# Altium PCB PCB1 (2).PcbDoc
Units mm, origin at the board's own origin, x right, y up, seen from the top; angles counter-clockwise.
Board outline 152.4 x 101.6 mm, 2 copper layers (Top Layer, Bottom Layer); 19 components, 27 nets, 95 pads, 1 vias.
Unrouted connection lines stored in the file: 3.
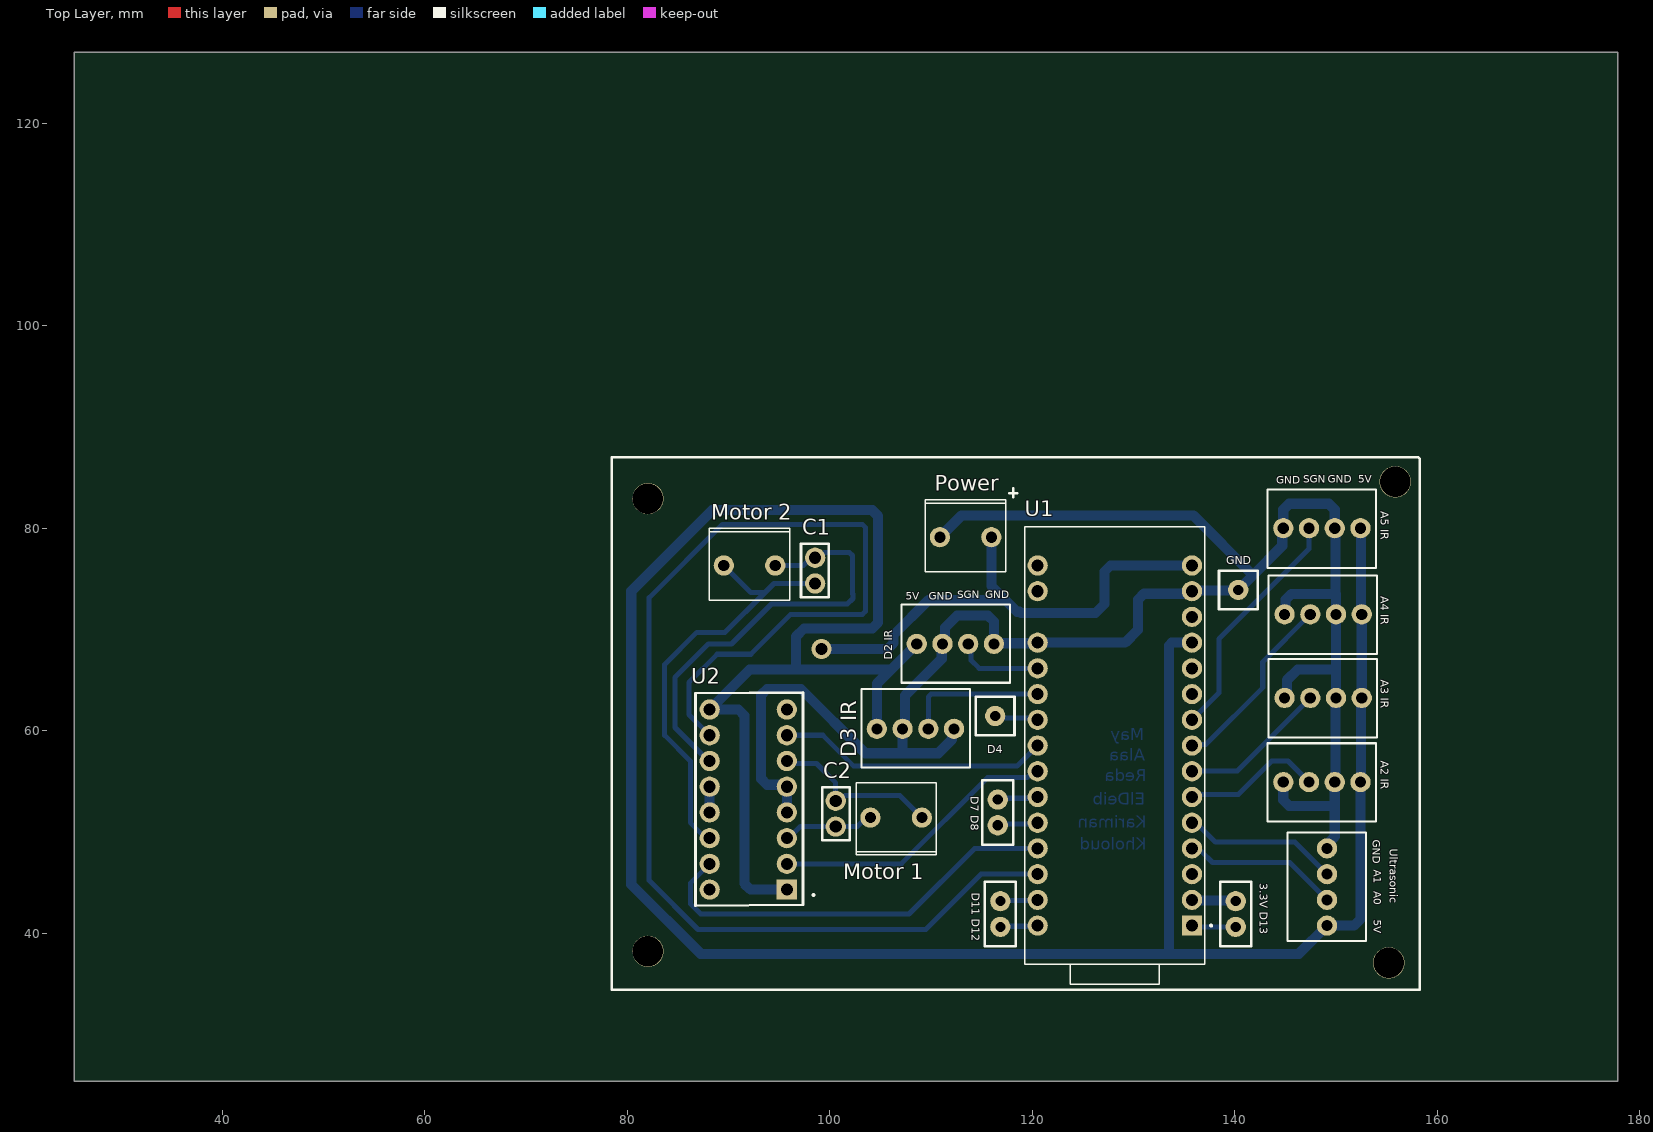
[diagram p0: Top Layer view]
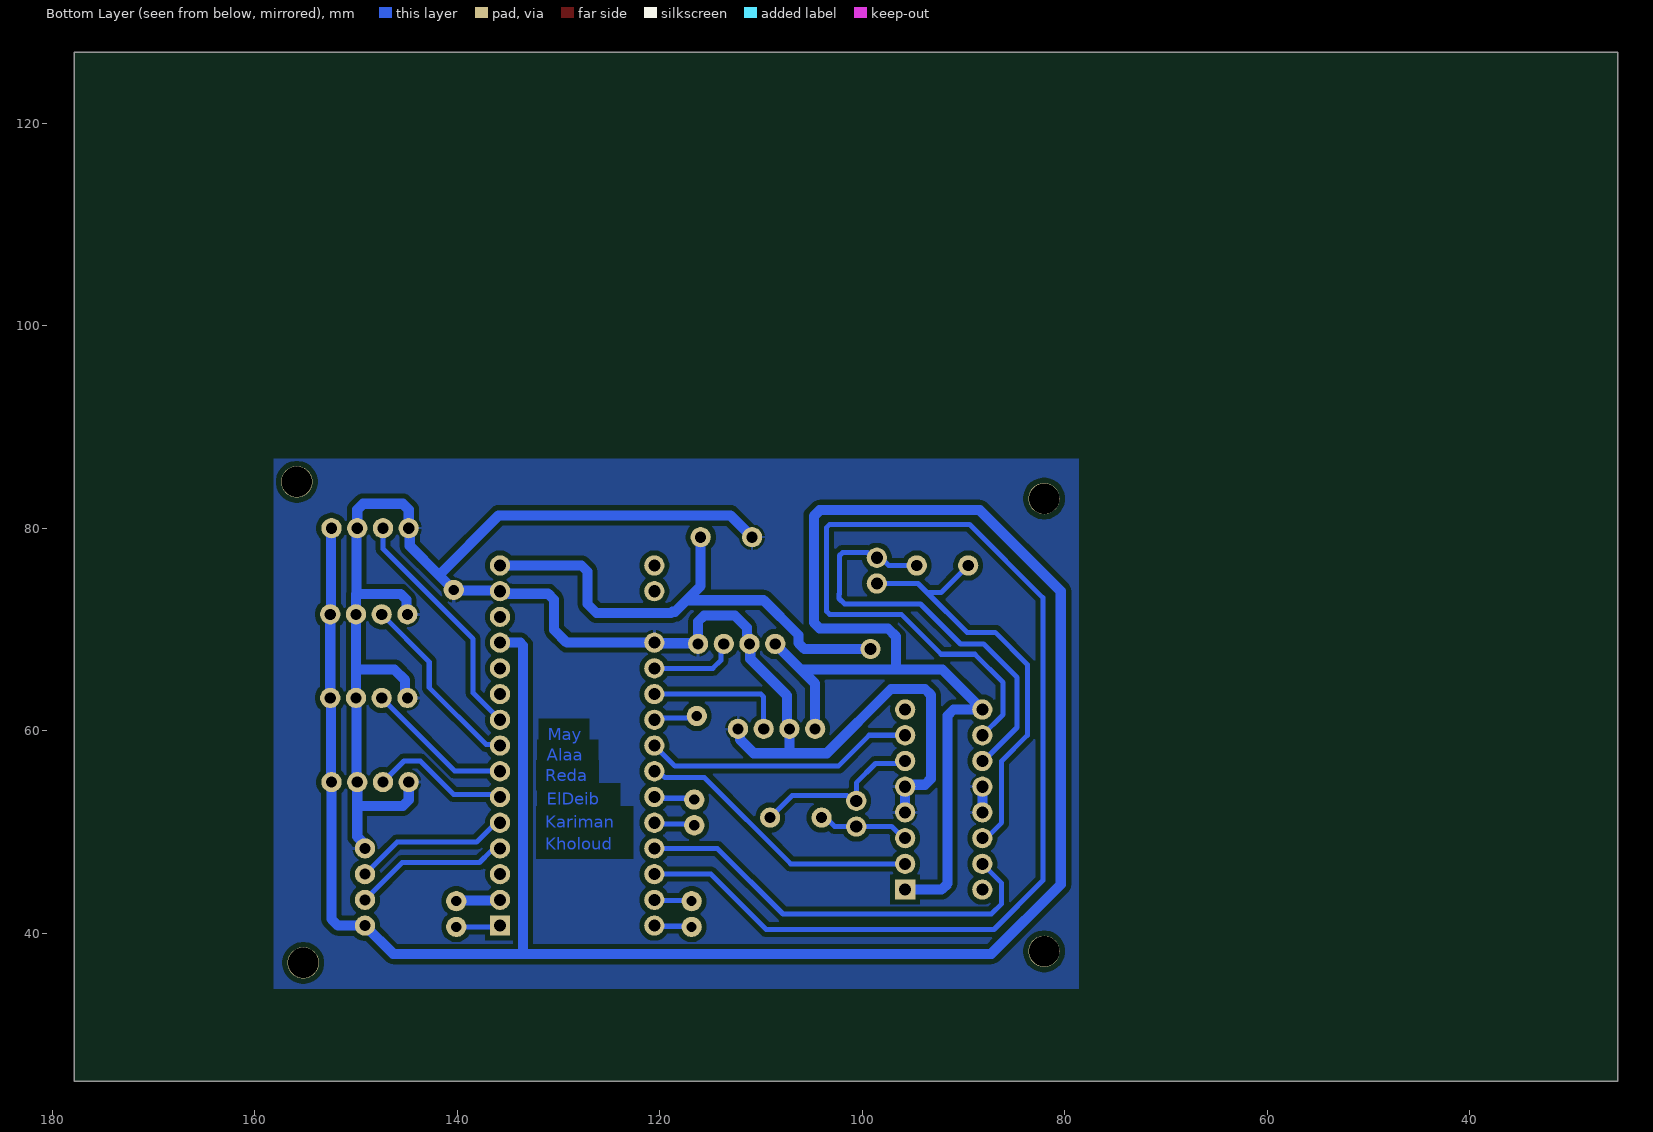
[diagram p1: Bottom Layer view, seen from below]
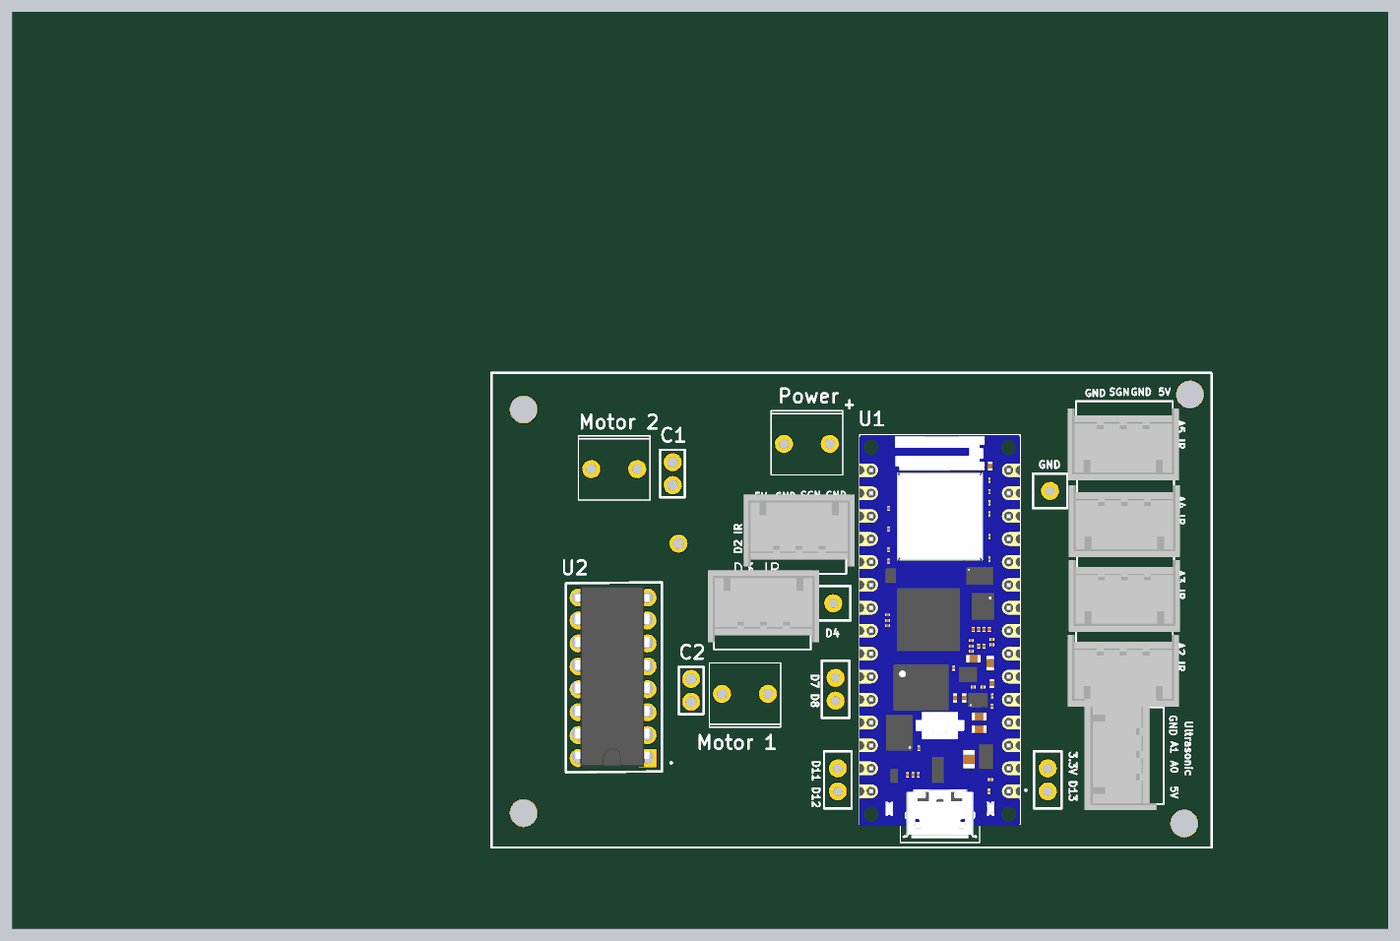
[diagram p2: 3D render of the assembled board from above, using the file's embedded part models]

## Layer stack, top to bottom
Top Solder: solder mask 0.0102, Solder Resist, Dk 3.5
Top Layer: signal copper 0.0356
Dielectric 1: dielectric 0.32, FR-4, Dk 4.8
Bottom Layer: signal copper 0.0356
Bottom Solder: solder mask 0.0102, Solder Resist, Dk 3.5

## Board outline
25.4,25.4 177.8,25.4 177.8,127 25.4,127

## Design rules (kind name [scope] priority, off if disabled: settings)
Clearance [All] p1: gap=0.5 ignorepadtopadclearanceinfootprint=TRUE
PolygonConnect [All] p1: connectstyle=Relief reliefconductorwidth=0.254 reliefentries=4 polygonreliefangle="90 Angle" airgapwidth=0.254
RoutingVias [All] p1: holewidth=0.711 width=1.27 viastyle="Through Hole" minholewidth=0.711 minwidth=1.27 maxholewidth=0.711 maxwidth=1.27
SolderMaskExpansion [All] p1: expansion=0.102 istentingtop=FALSE
Width [All] p1: maxlimit=1 minlimit=0.5 preferedwidth=0.7
30 further rules are at their usual default settings.

## Classes and differential pairs
component class Sheet1: "3.3V D13" "A2 IR" "A3 IR" "A4 IR" "A5 IR" C1 C2 "D2 IR" "D3 IR" "D7 D8" "D11 D12" GND "Motor 1" "Motor 2" Power U1 U2 Ultrasonic

## Components (designator, comment, footprint, x,y, rotation, side; value= is the part's Value field where it differs from the comment)
"3.3V D13" "2 pin female header" "2 pin female header" 140.081,49.098 r90 top (schematic designator nrf)
"A2 IR" "4pin jst" "4PIN JST" 149.225,49.911 r180 top
"A3 IR" "4pin jst" "4PIN JST" 149.352,58.217 r180 top
"A4 IR" "4pin jst" "4PIN JST" 149.352,66.472 r180 top
"A5 IR" "4pin jst" "4PIN JST" 149.225,74.981 r180 top
C1 "Capacitor" CAPACITOR 98.552,77.089 r270 top
C2 "Capacitor" CAPACITOR 100.584,50.546 r90 top
"D2 IR" "4pin jst" "4PIN JST" 111.76,73.609 r0 top
"D3 IR" "4pin jst" "4PIN JST" 107.823,65.227 r0 top
D4 "1 pin female header" "1 pin female header" 116.307,58.877 r90 top (schematic designator "digitAL PIN")
"D7 D8" "2 pin female header" "2 pin female header" 116.586,44.755 r270 top (schematic designator nrf3)
"D11 D12" "2 pin female header" "2 pin female header" 116.84,34.722 r270 top (schematic designator "nrf 2")
GND "1 pin female header" "1 pin female header" 140.31,71.323 r90 top (schematic designator "gnd pin")
"Motor 1" "2pin terminal block" "2PIN TERMINAL BLOCK" 107.417,57.887 r0 top
"Motor 2" "2pin terminal block" "2PIN TERMINAL BLOCK" 91.211,69.875 r180 top
Power "2pin terminal block" "2PIN TERMINAL BLOCK" 112.547,72.669 r180 top
U1 "Arduino Nano" "Arduino Nano" 128.143,58.547 r90 top
U2 "L293D" L293D 91.358,53.213 r180 top
Ultrasonic "4pin jst" "4PIN JST" 144.069,43.942 r90 top

## Footprints (in the part's own frame and the unit in brackets; to place one, negate y for a bottom-side part, rotate by r counter-clockwise, add the part's x,y. Pads: shape width x height; smd on the part's side, far side on the other; paste and mask are expansions set on the pad)
"1 pin female header" [mm]
  round 2 hole 1: 1(2.591,-0.025)
  silkscreen extent 0.69,-1.93 4.5,1.88
"2 pin female header" [mm]
  round 2 hole 1: 1(-8.458,0) 2(-5.918,0)
  silkscreen extent -10.36,-1.52 -4.01,1.52
"2PIN TERMINAL BLOCK" [mm]
  round 2 hole 1.1: 1(-3.404,-6.452) 2(1.676,-6.452)
  silkscreen extent -4.83,-10.13 3.1,-3.02, body extent -6.29,-11.07 4.31,-2.07, height 12.63
"4PIN JST" [mm]
  round 2 hole 1.1: 1(-3.175,-5.029) 2(-0.635,-5.029) 3(1.905,-5.029) 4(4.445,-5.029)
  silkscreen extent -4.7,-8.86 6.02,-1.12, body extent -5.36,-8.05 6.93,-0.1, height 10.43
"Arduino Nano" [mm]
  rect 2x2 hole 1.2: 1(-17.78,-7.62)
  round 2 hole 1.2: 2(-15.24,-7.62) 3(-12.7,-7.62) 4(-10.16,-7.62) 5(-7.62,-7.62) 6(-5.08,-7.62) 7(-2.54,-7.62) 8(0,-7.62) 9(2.54,-7.62) 10(5.08,-7.62) 11(7.62,-7.62) 12(10.16,-7.62) 13(12.7,-7.62) 14(15.24,-7.62) 15(17.78,-7.62) 16(17.78,7.62) 17(15.24,7.62) 19(10.16,7.62) 20(7.62,7.62) 21(5.08,7.62) 22(2.54,7.62) 23(0,7.62) 24(-2.54,7.62) 25(-5.08,7.62) 26(-7.62,7.62) 27(-10.16,7.62) 28(-12.7,7.62) 29(-15.24,7.62) 30(-17.78,7.62)
  silkscreen extent -23.59,-9.6 21.59,8.88, body extent -23.11,-8.89 21.47,8.88, height 8.51
CAPACITOR [mm]
  round 2 hole 1.2: 1(0,0) 2(2.54,0)
  silkscreen extent -1.37,-1.4 3.89,1.35
L293D [mm]
  rect 2x2 hole 1.2: 1(-4.4,8.89)
  round 2 hole 1.2: 2(-4.4,6.35) 3(-4.4,3.81) 4(-4.4,1.27) 5(-4.4,-1.27) 6(-4.4,-3.81) 7(-4.4,-6.35) 8(-4.4,-8.89) 9(3.22,-8.89) 10(3.22,-6.35) 11(3.22,-3.81) 12(3.22,-1.27) 13(3.22,1.27) 14(3.22,3.81) 15(3.22,6.35) 16(3.22,8.89)
  silkscreen extent -7.14,-10.57 4.62,10.46, body extent -5.12,-10.16 4.12,9.84, height 1.9

## Part data
"A2 IR" "A3 IR" "A4 IR" "A5 IR" "D2 IR" "D3 IR" Ultrasonic: "Connector Header Through Hole 4 position 0.079 (2.00mm)", Package=None, Availability="In Stock", Check_prices=https://www.snapeda.com/parts/B4B-PH-K/JST/view-part/?ref=eda, MF=JST, MP=B4B-PH-K, Price=None, Purchase-URL=https://pricing.snapeda.com/search/part/B4B-PH-K/?ref=eda, SnapEDA_Link=https://www.snapeda.com/parts/B4B-PH-K/JST/view-part/?ref=snap
"Motor 1" "Motor 2" Power: "Connector Terminal Blocks Receptacle 2 Position 5.08mm Solder Straight Thru-Hole 13.5A/Contact", Package=None, Availability="In Stock", Check_prices=https://www.snapeda.com/parts/282837-2/TE+Connectivity+AMP+Connectors/view-part/?ref=eda, MF="TE Connectivity", MP=282837-2, Price=None, Purchase-URL=https://pricing.snapeda.com/search/part/282837-2/?ref=eda, SnapEDA_Link=https://www.snapeda.com/parts/282837-2/TE+Connectivity+AMP+Connectors/view-part/?ref=snap
U1: "NINA-W102, RP2040 Arduino Nano RP2040 Connect with Headers series ARMÂ® CortexÂ®-M0+ MCU 32-Bit Embedded Evaluation Board", Package=None, Check_prices=https://www.snapeda.com/parts/ABX00053/Arduino/view-part/?ref=eda, Digi-Key_Part_Number=1050-ABX00053-ND, MF=Arduino, MP=ABX00053, Purchase-URL=https://pricing.snapeda.com/search/part/ABX00053/?ref=eda, SnapEDA_Link=https://www.snapeda.com/parts/ABX00053/Arduino/view-part/?ref=snap
U2: "Bipolar Motor Driver - Parallel 16-PowerDIP", Package="DIP-16 STMicroelectronics", Availability="In Stock", Check_prices=https://www.snapeda.com/parts/L293D/STMicroelectronics/view-part/?ref=eda, MF=STMicroelectronics, MP=L293D, Price=None, Purchase-URL=https://pricing.snapeda.com/search/part/L293D/?ref=eda, SnapEDA_Link=https://www.snapeda.com/parts/L293D/STMicroelectronics/view-part/?ref=snap

## Free pads (board coordinates)
  round 3.1 hole 3: 2(82.042,38.227) 2(82.042,82.931) 2(155.194,37.084) 2(155.829,84.582)

## Via types
v1: diameter 2, hole 1.2, Top Layer to Bottom Layer, 1 vias

## Nets (pads, with @x,y where several pads share a name; then routed paths per layer and width w, separated by ;. In a path a pad name is that pad's centre, name@x,y a point inside that pad or via, vN(x,y) a via of type N, cw(c..) or ccw(c..) an arc to the next point about the centre after c; other vN are vias at no path point)
+3.3V: "3.3V D13.2" U1.2 | length 4.4
  Bottom Layer w0.5: U1.2 U1.2@135.826,43.243 ; 140.017,43.243 140.081,43.18
  Bottom Layer w1: U1.2@135.826,43.243 140.017,43.243
+5V: "A2 IR.1" "A3 IR.1" "A4 IR.1" "A5 IR.1" "D2 IR.1" "D3 IR.1" U1.12 U2.1 U2.9 Ultrasonic.1 | length 281.6
  Bottom Layer w0.5: 133.477,38.266 133.77,37.973 ; 133.477,68.414 133.77,68.707 ; 152.4,54.94 152.463,55.004 ; 152.4,80.01 152.463,79.947 ; 152.463,63.182 152.527,63.246 ; 152.463,71.564 152.527,71.501
  Bottom Layer w1: U2.1 92.153,44.323 91.567,44.909 91.567,61.517 90.981,62.103 U2.9 92.075,66.04 96.647,66.04 ; 104.648,60.198 104.648,64.643 106.045,66.04 ; 108.585,68.58 106.045,66.04 ; 133.477,38.266 133.477,68.414 ; 133.77,68.707 U1.12 ; 152.4,54.94 152.4,41.402 151.765,40.767 Ultrasonic.1 146.304,37.973 133.77,37.973 87.249,37.973 80.391,44.831 80.391,73.787 88.392,81.788 104.189,81.788 104.775,81.202 104.775,70.689 104.189,70.104 97.46,70.104 96.647,69.291 96.647,66.04 ; 152.463,55.004 152.463,63.182 ; 152.463,71.564 152.463,79.947 ; 152.527,63.246 152.527,71.501 ; 96.647,66.04 106.045,66.04
A0: U1.4 Ultrasonic.2 | length 15.4
  Bottom Layer w0.5: U1.4 136.05,48.1 136.685,48.1 137.795,46.99 145.415,46.99 Ultrasonic.2
A1: U1.5 Ultrasonic.3 | length 15.4
  Bottom Layer w0.5: U1.5 136.169,50.927 138.074,49.022 145.923,49.022 Ultrasonic.3
A2: "A2 IR.3" U1.6 | length 13.9
  Bottom Layer w0.5: U1.6 136.017,53.721 140.335,53.721 143.637,57.023 145.237,57.023 147.32,54.94
A3: "A3 IR.3" U1.7 | length 14.7
  Bottom Layer w0.5: U1.7 135.802,56.046 140.247,56.046 147.447,63.246
A4: "A4 IR.3" U1.8 | length 18.5
  Bottom Layer w0.5: U1.8 135.865,58.649 137.135,58.649 142.748,64.262 142.748,66.802 147.447,71.501
A5: "A5 IR.3" U1.9 | length 23.7
  Bottom Layer w0.5: U1.9 138.43,63.754 138.43,69.088 147.32,77.978 147.32,80.01
A6: U1.10
D2: "D2 IR.3" U1.20 | length 8.6
  Bottom Layer w0.5: 113.665,68.58 113.952,68.293 113.952,66.968 114.753,66.167 U1.20
D3: "D3 IR.3" U1.21 | length 14.1
  Bottom Layer w0.5: 109.728,60.198 109.728,63.334 110.021,63.627 U1.21
D4: D4.1 U1.22 | length 4.3
  Bottom Layer w0.5: D4.1 116.522,61.277 120.332,61.277 U1.22
D7: "D7 D8.1" U1.25 | length 4
  Bottom Layer w0.5: 116.586,53.213 116.713,53.34 120.396,53.34 U1.25
D8: "D7 D8.2" U1.26 | length 4
  Bottom Layer w0.5: 116.586,50.673 116.713,50.8 120.396,50.8 U1.26
D11: "D11 D12.1" U1.29 | length 3.7
  Bottom Layer w0.5: 116.84,43.18 116.903,43.243 120.459,43.243 U1.29
D12: "D11 D12.2" U1.30 | length 3.7
  Bottom Layer w0.5: 116.84,40.64 116.903,40.703 120.459,40.703 U1.30
D13: "3.3V D13.1" U1.1 | length 4.4
  Bottom Layer w0.5: U1.1 135.89,40.64 140.081,40.64
GND: "A2 IR.2" "A2 IR.4" "A3 IR.2" "A3 IR.4" "A4 IR.2" "A4 IR.4" "A5 IR.2" "A5 IR.4" "D2 IR.2" "D2 IR.4" "D3 IR.2" "D3 IR.4" GND.1 Power.2 U1.14 U1.19 U2.4 U2.5 U2.12 U2.13 Ultrasonic.4 | length 194.2
  Bottom Layer w0.5: U2.12 U2.12@88.237,54.582 ; 107.188,60.198 107.442,60.452 ; 116.205,68.58 116.268,68.644 ; U1.19@120.459,68.644 U1.19 ; U1.14 U1.14@135.826,73.85 ; GND.1@140.272,73.85 GND.1 ; 144.681,79.911 144.78,80.01 ; 144.907,63.246 145.133,63.472 ; 144.907,71.501 144.907,71.69 ; Ultrasonic.4 Ultrasonic.4@149.098,48.793 ; 149.86,54.94 149.923,55.004 ; 149.86,80.01 149.923,79.947 ; 149.923,63.182 149.987,63.246
  Bottom Layer w1: U2.13 U2.12 ; U2.4 U2.5 95.567,54.674 93.804,54.674 93.218,55.26 93.218,63.549 93.804,64.135 97.155,64.135 103.505,57.785 107.188,57.785 ; 107.188,60.198 107.188,57.785 ; 107.442,60.452 107.442,63.5 111.056,67.114 111.056,68.511 111.316,68.771 111.316,69.478 111.379,69.541 111.379,70.192 112.561,71.374 115.619,71.374 116.205,70.788 116.205,68.58 ; Power.2 113.03,81.28 135.89,81.28 141.796,75.374 ; 112.268,60.198 112.077,60.007 112.077,59.158 110.704,57.785 107.188,57.785 ; 116.268,68.644 U1.19@120.459,68.644 ; U1.19 129.159,68.707 130.429,69.977 130.429,72.947 131.015,73.533 134.802,73.533 134.865,73.596 135.572,73.596 U1.14 ; U1.14@135.826,73.85 GND.1@140.272,73.85 ; GND.1 141.796,75.374 ; 144.681,79.911 144.681,78.26 141.796,75.374 ; 144.78,54.94 144.78,53.164 145.366,52.578 149.86,52.578 ; 144.78,80.01 144.78,81.837 145.366,82.423 149.274,82.423 149.86,81.837 149.86,80.01 ; 144.907,71.69 145.001,71.784 145.001,72.942 145.587,73.528 149.923,73.528 ; 145.133,63.472 145.133,64.996 146.177,66.04 149.987,66.04 ; Ultrasonic.4@149.098,48.793 149.86,49.555 149.86,52.578 ; 149.86,54.94 149.86,52.578 ; 149.923,55.004 149.923,63.182 ; 149.923,79.947 149.923,73.528 ; 149.987,63.246 149.987,66.04 ; 149.923,73.528 149.987,73.528 149.987,71.501 149.987,66.04
M11: "Motor 1.1" C2.1 U2.3 | length 9.1
  Bottom Layer w0.5: U2.3 95.947,49.403 97.09,50.546 C2.1 102.718,50.546 103.607,51.435 104.013,51.435
M11A: U1.24 U2.2 | length 28.6
  Bottom Layer w0.5: U2.2 107.061,46.863 115.57,55.372 119.482,55.372 120.117,56.007 U1.24
M12: "Motor 1.2" C2.2 U2.6 | length 17.1
  Bottom Layer w0.5: U2.6 96.012,56.769 98.679,56.769 100.584,54.864 C2.2 100.99,53.086 101.498,53.594 106.934,53.594 109.093,51.435
M12A: U1.23 U2.7 | length 26.9
  Bottom Layer w0.5: U2.7 99.314,59.563 102.362,56.515 118.491,56.515 U1.23
M21: "Motor 2.1" C1.1 U2.11 | length 43.6
  Bottom Layer w0.5: U2.11 88.021,57.023 84.709,60.335 84.709,65.278 88.011,68.58 90.297,68.58 94.234,72.517 101.727,72.517 102.282,73.072 102.282,73.486 102.235,73.533 102.235,77.304 101.942,77.597 99.466,77.597 98.958,77.089 C1.1 98.146,77.089 97.384,76.327 94.615,76.327 ; 94.234,76.708 94.771,76.708
M21A: U1.28 U2.10 | length 129.7
  Bottom Layer w0.5: U2.10 86.106,61.595 86.106,64.792 88.878,67.564 92.202,67.564 96.139,71.501 103.212,71.501 103.505,71.794 103.505,80.098 103.212,80.391 89.408,80.391 82.169,73.152 82.169,45.212 86.995,40.386 109.474,40.386 114.935,45.847 U1.28
M22: "Motor 2.2" C1.2 U2.14 | length 42.7
  Bottom Layer w0.5: U2.14 87.757,49.403 86.233,50.927 86.233,57.023 83.693,59.563 83.693,66.548 86.868,69.723 89.662,69.723 93.599,73.66 ; 89.408,76.2 89.535,76.327 92.202,73.66 93.599,73.66 ; C1.2 94.488,74.549 93.599,73.66
M22A: U1.27 U2.15 | length 42.1
  Bottom Layer w0.5: U2.15 86.233,44.958 86.233,42.926 87.249,41.91 107.823,41.91 114.3,48.387 U1.27
VCC: Power.1 U1.15 U2.8 U2.16 | length 50.2
  Bottom Layer w1: v1(99.187,68.072) 105.713,68.072 106.299,68.658 106.299,69.469 109.728,72.898 117.348,72.898 ; Power.1 115.951,74.295 117.348,72.898 ; U1.15 127.713,76.327 127.127,75.741 127.127,72.517 126.238,71.628 118.872,71.628 118.745,71.755 118.491,71.755 117.348,72.898
pads on no net: U1.3 U1.11 U1.13 U1.16 U1.17

## Polygon pours and split planes (outlines as drawn)
GND on Bottom Layer "NONET_L-01_P-001" (solid, pour order 0): 78.613,34.544 78.613,86.868 158.115,86.868 158.115,34.544

## Other copper
Bottom Layer:
  text "May" at 131.045,59.093 h1.2
  text "Alaa" at 131.172,57.042 h1.2
  text "Reda" at 131.299,55.01 h1.2
  text "ElDeib" at 131.172,52.724 h1.2
  text "Kariman" at 131.299,50.438 h1.2
  text "Kholoud" at 131.299,48.279 h1.2

## Silkscreen, mask and mechanical layers (free items; w line width, h text height)
Top Overlay:
  lines w0.254: 117.729,83.439 118.491,83.439 ; 118.11,83.058 118.11,83.947 ; 78.486,34.417 158.242,34.417 158.242,86.868 158.115,86.995 78.486,86.995 78.486,34.417
  text "SGN" at 146.736,84.506 h0.76
  text "GND" at 149.149,84.506 h0.76
  text "5V" at 152.197,84.506 h0.76
  text "GND" at 144.069,84.379 h0.76
  text "SGN" at 112.573,73.076 h0.76
  text "GND" at 115.367,73.076 h0.76
  text "5V" at 107.493,72.949 h0.76
  text "GND" at 109.779,72.949 h0.76
  text "GND" at 153.594,49.225 h0.76 r270
  text "A1" at 153.721,46.304 h0.76 r270
  text "A0" at 153.721,44.145 h0.76 r270
  text "5V" at 153.721,41.351 h0.76 r270